# Altium PCB PCB1.PcbDoc
Units mil, origin at the board's own origin, x right, y up, seen from the top; angles counter-clockwise.
Board outline 1810 x 1180 mil, 2 copper layers (Top Layer, Bottom Layer); 39 components, 27 nets, 148 pads, 32 vias.
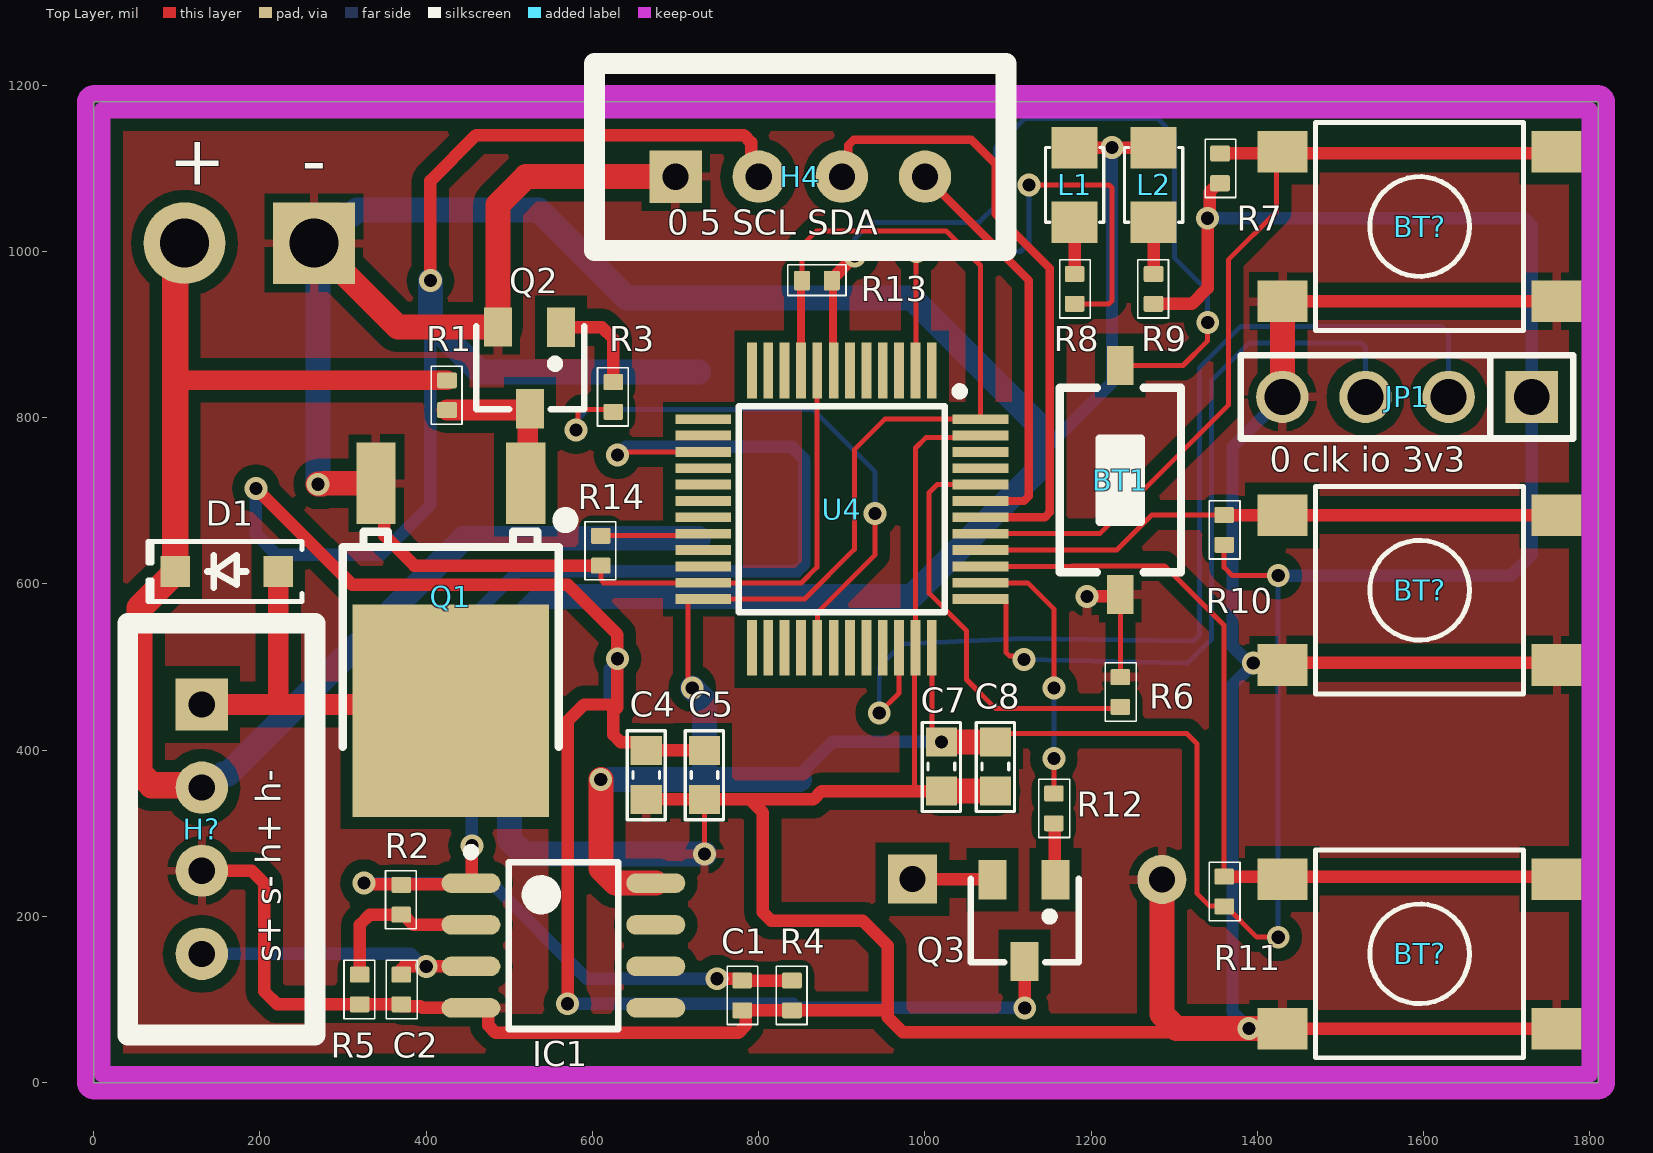
[diagram p0: Top Layer view]
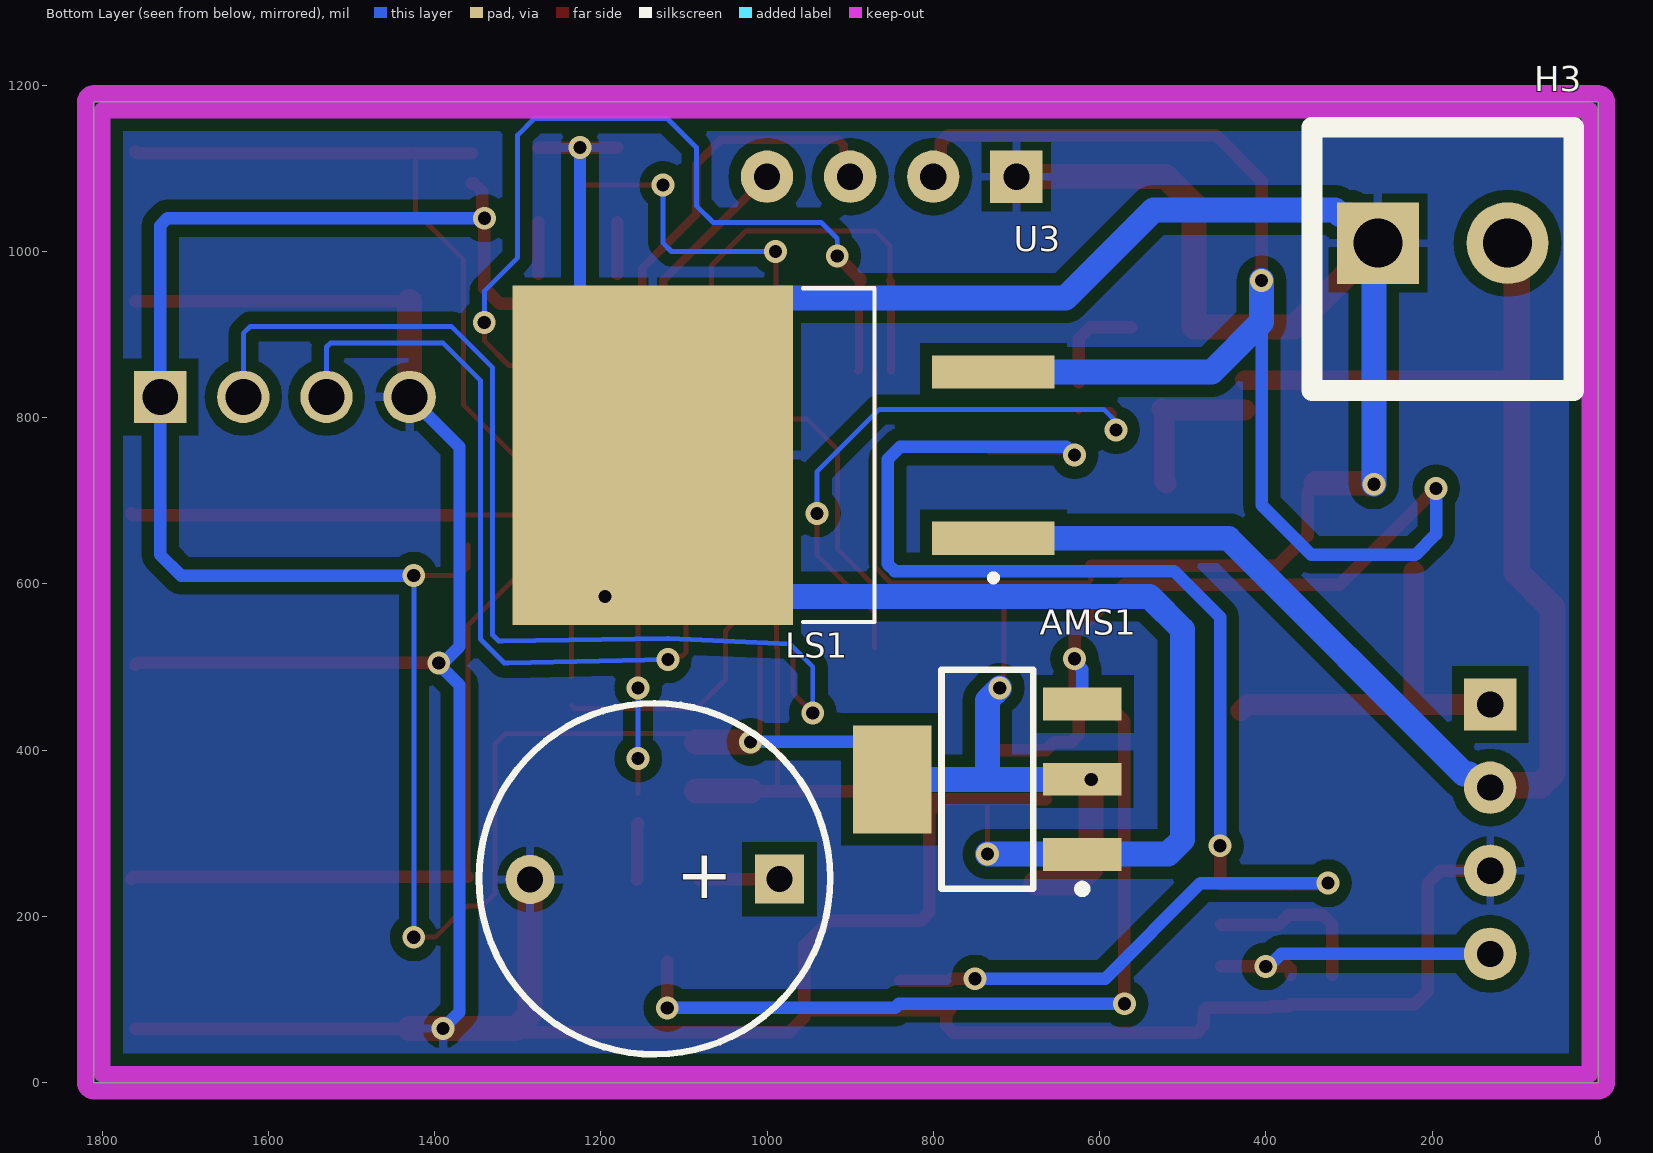
[diagram p1: Bottom Layer view, seen from below]
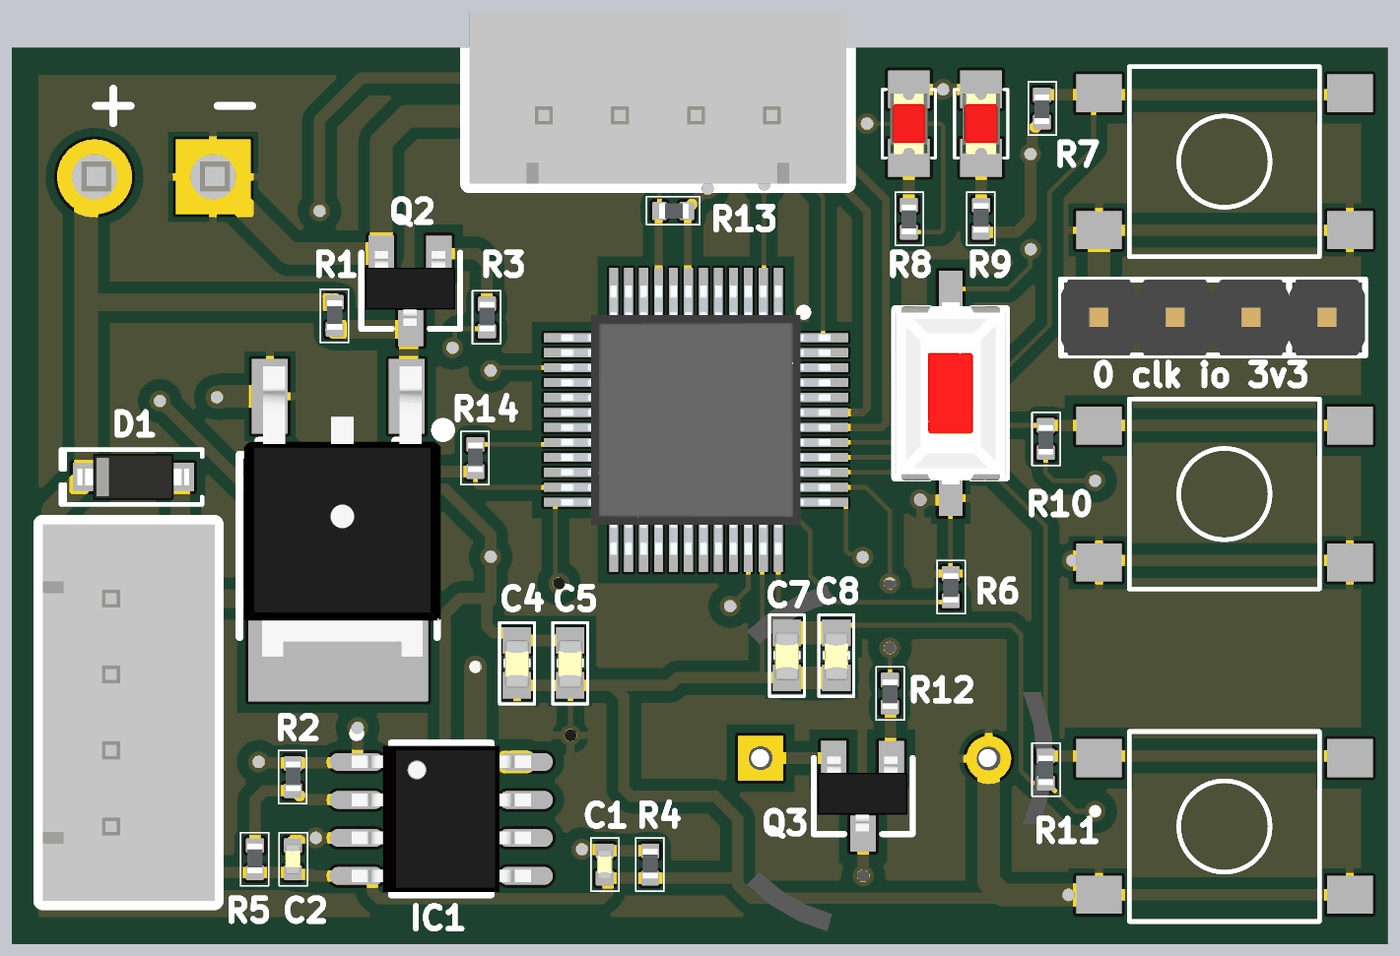
[diagram p2: 3D render of the assembled board from above, using the file's embedded part models]
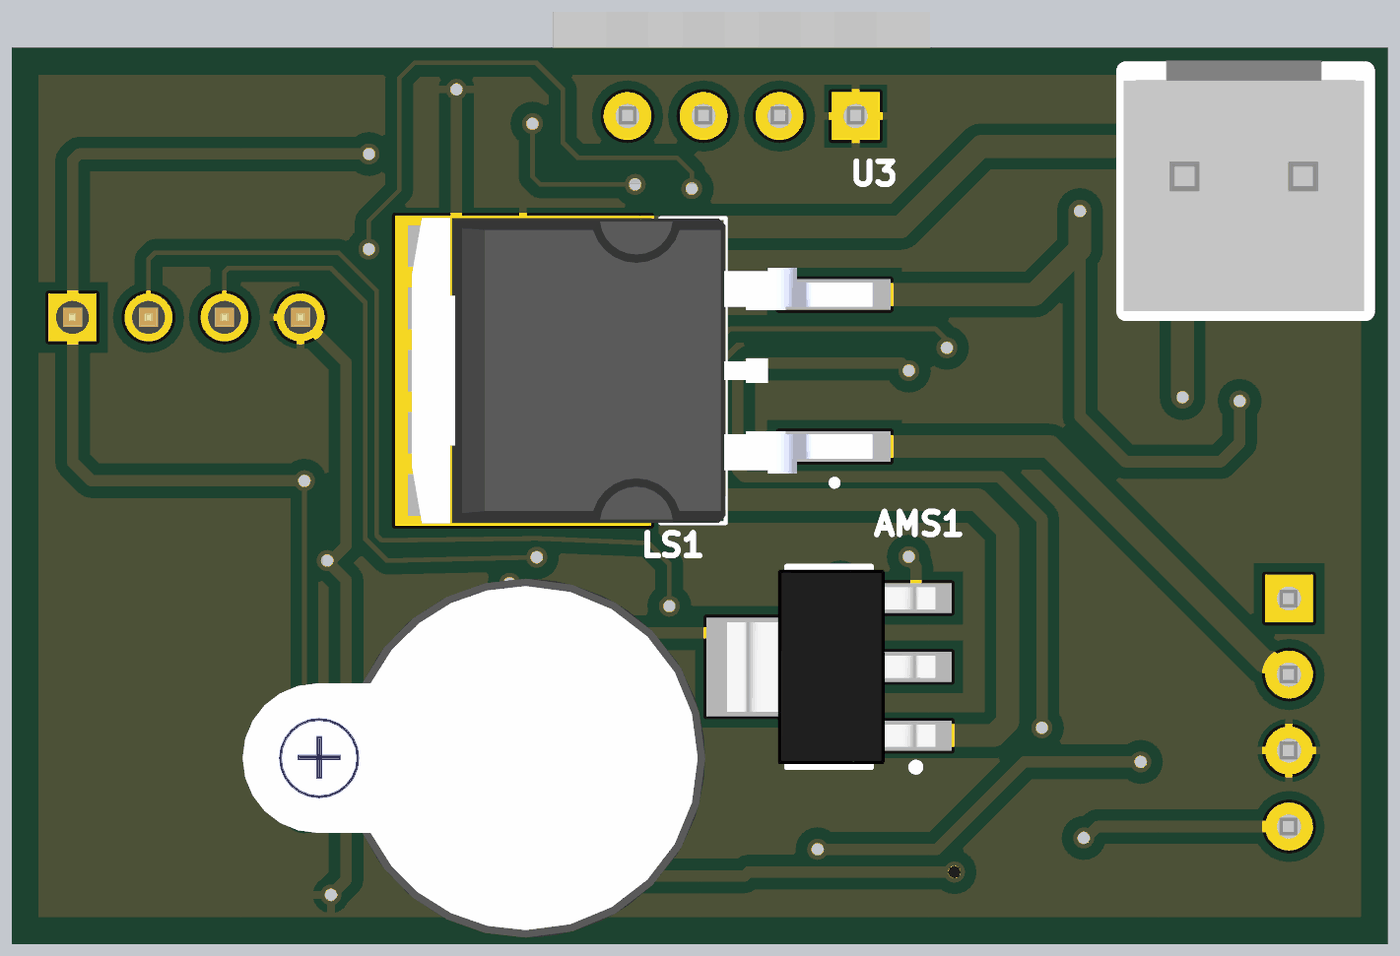
[diagram p3: 3D render of the assembled board from below, using the file's embedded part models]

## Layer stack, top to bottom
Top Solder: solder mask 0.4, Solder Resist, Dk 3.5
Top Layer: signal copper 1.4
Dielectric 1: dielectric 12.6, FR-4, Dk 4.8
Bottom Layer: signal copper 1.4
Bottom Solder: solder mask 0.4, Solder Resist, Dk 3.5

## Board outline
0,1180 0,0 1810,0 1810,1180

## Design rules (kind name [scope] priority, off if disabled: settings)
Clearance [All] p1: gap=15 ignorepadtopadclearanceinfootprint=FALSE
PolygonConnect [All] p1: connectstyle=Relief reliefconductorwidth=10 reliefentries=4 polygonreliefangle="90 Angle" airgapwidth=10
RoutingVias [All] p1: holewidth=11.81 width=27.56 viastyle="Through Hole" minholewidth=11.81 minwidth=27.56 maxholewidth=11.81 maxwidth=27.56
SolderMaskExpansion [All] p1: expansion=4 istentingtop=FALSE
Width [All] p1: maxlimit=30 minlimit=6 preferedwidth=15
30 further rules are at their usual default settings.

## Classes and differential pairs
component class Sheet1: AMS1 BT1 BT? C1 C2 C4 C5 C7 C8 D1 H3 H4 IC1 JP1 L1 L2 LS1 Q1 Q2 Q3 R1 R2 R3 R4 R5 R6 R7 R8 R9 R10 R11 R12 R13 R14 U3 U4

## Components (designator, comment, footprint, x,y, rotation, side; value= is the part's Value field where it differs from the comment)
AMS1 "AMS1117-3.3V" SOT223 735,365 r90 bottom value="AMS1117-3.3V SOT223"
BT1 "Nut Nhan 2 Chan SMD 3x6x2.5" "Nut Nhan 2 Chan SMD 3x6x2.5" 1235,725 r90 top
BT? "Nut Nhan 4 Chan SMD 6x6" "Nut Nhan 4 Chan SMD 6x6" 1595,1030 r0 top
BT? "Nut Nhan 4 Chan SMD 6x6" "Nut Nhan 4 Chan SMD 6x6" 1595,592.5 r0 top
BT? "Nut Nhan 4 Chan SMD 6x6" "Nut Nhan 4 Chan SMD 6x6" 1595,155 r0 top
C1 "102" "Cap 0402" 780,104 r270 top
C2 "102" "Cap 0402" 370,111.09 r270 top
C4 "10uF" "Cap 0603" 665,370 r270 top
C5 "0.1uF" "Cap 0603" 735,370 r270 top
C7 "0.1uF" "Cap 0603" 1020,380 r270 top
C8 "0.1uF" "Cap 0603" 1085,380 r270 top
D1 "S4" "DIODE SOD-123" 160,615 r180 top
H3 "source" VH3.96M-2 187.05,1010 r180 bottom
H4 "Header 4P 2.54 Duc Thang" XH2.54M-4 700,1090 r0 top
H? "Header 4P 2.54 Duc Thang" XH2.54M-4 130,455 r270 top
IC1 "LM358 SOP8" "SOP 8" 565,165 r0 top
JP1 "JP 1x4 2.54" "JP 1x4 DT" 1730,825 r180 top
L1 "LED 0805" LED-0805-Red 1180,1035 r90 top
L2 "LED 0805" LED-0805-Red 1275,1035 r90 top
LS1 "Coi Chip Speaker" "Coi Chip Speacker" 985,245 r0 bottom
Q1 "TO-252" TO-252-3_L6.6-W6.1-P4.57-LS9.9-BR-CW 435,545 r90 top
Q2 "BC817" SOT-23 525,860 r180 top value=C9014
Q3 "BC817" SOT-23 1120,195 r180 top value=C9014
R1 "10K" "RES 0402" 425,827.09 r90 top
R2 "10k" "RES 0402" 370,220 r90 top
R3 "4K7" "RES 0402" 625,825 r90 top
R4 "10k" "RES 0402" 840,105 r90 top
R5 "100R" "RES 0402" 320,112.09 r90 top
R6 "10k" "RES 0402" 1235,470 r270 top
R7 "10k" "RES 0402" 1355,1100 r270 top
R8 "?" "RES 0402" 1180,955 r270 top
R9 "10k" "RES 0402" 1275,955 r90 top (schematic designator R?)
R10 "10k" "RES 0402" 1360,665 r270 top
R11 "10k" "RES 0402" 1360,230 r270 top
R12 "470R" "RES 0402" 1155,330 r270 top
R13 "10k" "RES 0402" 870,965 r0 top
R14 "10k" "RES 0402" 610,640 r90 top
U3 "7805CD2T" TO254P1542X460-3N 980,755 r0 bottom
U4 "STM32F103C8T6" LQFP-48_19.6_393_58X11_SMD 900,690 r270 top

## Footprints (in the part's own frame and the unit in brackets; to place one, negate y for a bottom-side part, rotate by r counter-clockwise, add the part's x,y. Pads: shape width x height; smd on the part's side, far side on the other; paste and mask are expansions set on the pad)
"Cap 0402" [mm]
  rrect20% 0.49x0.6 smd: 1(-0.48,0) 2(0.43,0)
  silkscreen extent -0.91,-0.46 0.86,0.48, body extent -0.53,-0.25 0.47,0.25, height 0.5
"Cap 0603" [mil]
  rect 35x37.4 smd mask+3: 1(-29.83,-0.32) 2(29.23,-0.32)
  silkscreen extent -53,-23 54,23, body extent -30,-16 32,15, height 31
"Coi Chip Speacker" [mm]
  rect 1.5x1.5 hole 0.8: 1(0,0)
  round 1.5 hole 0.8: 2(7.62,0.013)
  silkscreen extent -1.55,-5.38 9.18,5.36, body extent -2.22,-6 13.24,6, height 4.5
"DIODE SOD-123" [mm] "SOD-123"
  rect 0.9x0.95 smd: 1(-1.575,0) 2(1.575,0)
  silkscreen extent -2.3,-0.92 2.41,0.92, body extent -1.86,-0.78 1.86,0.77, height 1.35
"JP 1x4 DT" [mm] "4 pins, 1 row, straight, gold plating"
  rect 1.6x1.6 hole 1.1: 1(0,0)
  round 1.6 hole 1.1: 2(2.54,0) 3(5.08,0) 4(7.62,0)
  silkscreen extent -1.27,-1.27 8.89,1.27, body extent -1.27,-1.27 8.89,1.27, height 8.54
LED-0805-Red [mil]
  rect 50x55 smd: 1(0,0) 2(90,0)
  silkscreen extent 0,-35 90,35, body extent 5,-25 85,25, height 43
LQFP-48_19.6_393_58X11_SMD [mm] "48LQFP"
  rect 1.7x0.3 smd mask+0.076: 1(-4.238,2.75) 2(-4.238,2.25) 3(-4.238,1.75) 4(-4.238,1.25) 5(-4.238,0.75) 6(-4.238,0.25) 7(-4.238,-0.25) 8(-4.238,-0.75) 9(-4.238,-1.25) 10(-4.238,-1.75) 11(-4.238,-2.25) 12(-4.238,-2.75) 25(4.238,-2.75) 26(4.238,-2.25) 27(4.238,-1.75) 28(4.238,-1.25) 29(4.238,-0.75) 30(4.238,-0.25) 31(4.238,0.25) 32(4.238,0.75) 33(4.238,1.25) 34(4.238,1.75) 35(4.238,2.25) 36(4.238,2.75)
  rect 0.3x1.7 smd mask+0.076: 13(-2.75,-4.238) 14(-2.25,-4.238) 15(-1.75,-4.238) 16(-1.25,-4.238) 17(-0.75,-4.238) 18(-0.25,-4.238) 19(0.25,-4.238) 20(0.75,-4.238) 21(1.25,-4.238) 22(1.75,-4.238) 23(2.25,-4.238) 24(2.75,-4.238) 37(2.75,4.238) 38(2.25,4.238) 39(1.75,4.238) 40(1.25,4.238) 41(0.75,4.238) 42(0.25,4.238) 43(-0.25,4.238) 44(-0.75,4.238) 45(-1.25,4.238) 46(-1.75,4.238) 47(-2.25,4.238) 48(-2.75,4.238)
  silkscreen extent -3.72,-3.15 3.15,3.73, body extent -4.5,-4.5 4.5,4.5, height 1.7
"Nut Nhan 2 Chan SMD 3x6x2.5" [mm] "Switch SMD type"
  rect 1.2x0.8 smd: 1(-3.5,0) 2(3.5,0)
  silkscreen extent -2.82,-1.85 2.82,1.85, body extent -3.05,-1.85 3.05,1.85, height 2.5
"Nut Nhan 4 Chan SMD 6x6" [mil] "SW SMD button 4pin, 250 x250 mil"
  rect 60x50 smd: 1(-165,90) 2(165,-90) 3(165,90) 4(-165,-90)
  silkscreen extent -125,-125 125,125, body extent -180,-125 180,125, height 130
"RES 0402" [mm]
  rrect20% 0.49x0.6 smd: 1(-0.455,0) 2(0.455,0)
  silkscreen extent -0.89,-0.46 0.89,0.48, body extent -0.47,-0.25 0.53,0.25, height 0.32
"SOP 8" [mm] "SOIC, 8-Leads, Body 4.9x3.9mm, Pitch 1.27mm, IPC High Density"
  oval 1.8x0.6 smd: 1(-2.825,1.905) 2(-2.825,0.635) 3(-2.825,-0.635) 4(-2.825,-1.905) 5(2.825,-1.905) 6(2.825,-0.635) 7(2.825,0.635) 8(2.825,1.905)
  silkscreen extent -2.95,-2.55 1.68,2.98, body extent -2.99,-2.45 3,2.45, height 1.6
SOT223 [mm]
  rect 1x2.4 smd: 1(-2.3,-2.9) 2(0,-2.9) 3(2.3,-2.9)
  rect 3.3x2.4 smd: 4(0,2.9)
  silkscreen extent -3.47,-3.02 3.35,1.4, body extent -3.25,-3.56 3.25,3.4, height 1.68
SOT-23 [mm] "SOT 23 _ 1-3-2"
  rect 0.85x1.2 smd: 1(-0.94,-1.245) 2(0.985,-1.25) 3(0.005,1.25)
  silkscreen extent -1.65,-1.27 1.65,1.27, body extent -1.47,-1.33 1.53,1.17, height 1.06
TO254P1542X460-3N [mm]
  rect 3.74x1.02 smd: 1(-6.41,2.54) 2(-6.41,-2.54)
  rect 8.56x10.37 smd paste-6: 3(4,0)
  silkscreen extent -6.51,-5.1 -0.59,5.1, body extent -7.71,-5.1 7.71,5.1, height 4.6
TO-252-3_L6.6-W6.1-P4.57-LS9.9-BR-CW [mm]
  rect 2.5x1.2 smd: 1(4.475,-2.149) 3(4.475,2.423)
  rect 6.5x6 smd: 2(-2.475,0.137)
  silkscreen extent -3.57,-3.56 3.55,3.44, body extent -4.23,-3.29 5.47,3.29, height 2.32
VH3.96M-2 [mm]
  rect 2.5x2.5 hole 1.5: 1(-1.98,0)
  round 2.5 hole 1.5: 2(1.98,0)
  silkscreen extent -4,-4.5 4,3.54, body extent -4.08,-4.49 3.96,3.88, height 10.26
XH2.54M-4 [mm]
  rect 1.6x1.6 hole 0.8: 1(0,0)
  round 1.6 hole 0.8: 2(2.54,0) 3(5.08,0) 4(7.62,0)
  silkscreen extent -2.48,-2.26 10.1,3.46, body extent -2.48,-2.26 10.1,3.48, height 6.91

## Part data
AMS1: library part "AMS1117 SMD", "Dán", Chung_Loai=Dán, Don_Vi=Con, Ma_Hang=MH000596
BT? BT? BT?: "Nut Nhan 4 Chan 6.2x6.2x3.5", Ma_Hang=MH002424, Ten="Nút Nhấn 4 Chân 6.2x6.2x3.1MM SMD"
C1 C2: library part "Cap 0402", "Capacitor SMD 0402"
C4 C5 C7 C8: library part "Cap 0603", "Capacitor SMD 0603"
D1: library part "Diode S4", "Dán", Chung_Loai=Dán, Don_Vi=Con, Ma_Hang=MH005519, Ten_Linh_Kien="Diode S4 SOD123 ( 1N5819 SOD123)"
H3: library part "Header 2P VH3.96 Duc Thang", "Cắm", Chung_Loai=Cắm, Don_Vi=Con, Ma_Hang=MH001283, Ten_Linh_Kien="Header 2P XH2.54-2P Đực Thẳng"
H4 H?: "Cắm", Chung_Loai=Cắm, Don_Vi=Con, Ma_Hang=MH001285, Ten_Linh_Kien="Header 4P XH2.54-4P Đực Thẳng"
IC1: "Dán", Chung_Loai=Dán, Don_Vi=Con, Ma_Hang=MH000609, Ten_Linh_Kien="LM358 SOP8"
JP1: library part "JP 1x4 2.54 Duc Thang", "Cắm", Chung_Loai=Cắm, Don_Vi=Con, Ma_Hang=MH000903, Ten_Linh_Kien="Jump Đơn Đực 2.54MM 1x40P Thẳng 11MM"
L1 L2: library part "LED 0805 Do", "Dán", Chung_Loai=Dán, Don_Vi=Con, Ma_Hang=MH000897, Ten_Linh_Kien="LED 0805 Màu Đỏ (Red)"
LS1: "Còi chip"
Q1: library part "FET AO D409", "P-Channel Power MOSFET", ComponentLink1Description="Manufacturer Link", ComponentLink1URL=http://www.irf.com/, ComponentLink2Description=Datasheet, ComponentLink2URL=http://www.irf.com/product-info/datasheets/data/irf9540.pdf, DatasheetVersion=PD-9.421C, LatestRevisionDate=17-Jul-2002, LatestRevisionNote="Re-released for DXP Platform.", Note="Pin 2 is electrically connected to pin 4.", PackageDescription="TO, Thru-Hole, Vertical, Heatsink Mounted; 3 In-Line Leads; Pitch 2.54 mm", PackageReference=TO-220AB, PackageVersion=Feb-1997, Published=8-Jun-2000, Publisher="Altium Limited"
Q2 Q3: library part "Trans BC817", "SOT-23 - C8658"
R1 R3 R5 R8 R12: library part "RES 0402", "RES SMD 0402", Manufacturer="Vishay Dale", Manufacturer Part Number=CRCW040210K0FKED, Operating Temperature="-55°C ~ 155°C", Package / Case="0402 (1005 Metric)", Power (Watts)="0.063W, 1/16W", Resistance (Ohms)=10k, Supplier Part Number 1=541-10.0KLCT-ND, Temperature Coefficient=±100ppm/°C, Tolerance=±1%, Category=Resistors, ComponentLink1Description=http://www.vishay.com/docs/20035/dcrcwe3.pdf, ComponentLink1URL=http://www.vishay.com/docs/20035/dcrcwe3.pdf, Composition="Thick Film", Features="Automotive AEC-Q200", Height="0.016\" (0.40mm)", Number of Terminations=2, Packaging="Cut Tape (CT)", Pricing 1="10=0.083, 50=0.0444, 200=0.0255, 1000=0.0174 (USD)", RoHS="RoHS Compliant", Size / Dimension="0.039\" L x 0.020\" W (1.00mm x 0.50mm)", Stock 1=2392462, Supplier 1=Digi-Key, Supplier Device Package="0402 (1005 Metric)"
R2 R4 R6 R7 R9 R10 R11 R13 R14: library part "RES 0402", "RES SMD 0402", Manufacturer="Vishay Dale", Manufacturer Part Number=CRCW040210K0FKED, Operating Temperature="-55°C ~ 155°C", Package / Case="0402 (1005 Metric)", Power (Watts)="0.063W, 1/16W", Supplier Part Number 1=541-10.0KLCT-ND, Temperature Coefficient=±100ppm/°C, Tolerance=±1%, Category=Resistors, ComponentLink1Description=http://www.vishay.com/docs/20035/dcrcwe3.pdf, ComponentLink1URL=http://www.vishay.com/docs/20035/dcrcwe3.pdf, Composition="Thick Film", Features="Automotive AEC-Q200", Height="0.016\" (0.40mm)", Number of Terminations=2, Packaging="Cut Tape (CT)", Pricing 1="10=0.083, 50=0.0444, 200=0.0255, 1000=0.0174 (USD)", Resistance (Ohms)=10k, RoHS="RoHS Compliant", Size / Dimension="0.039\" L x 0.020\" W (1.00mm x 0.50mm)", Stock 1=2392462, Supplier 1=Digi-Key, Supplier Device Package="0402 (1005 Metric)"
U3: "Linear Voltage Regulator IC Positive Fixed 1 Output 1.5A D2PAK", Package="D2PAK STMicroelectronics", Check_prices=https://www.snapeda.com/parts/7805CD2T/STMicroelectronics/view-part/?ref=eda, MF=STMicroelectronics, MP=7805CD2T, SnapEDA_Link=https://www.snapeda.com/parts/7805CD2T/STMicroelectronics/view-part/?ref=snap
U4: library part IC_STM32F103C8T6, "ARM® Cortex®-M3 STM32F1 Microcontroller IC 32-Bit 72MHz 64KB (64K x 8) FLASH 48-LQFP (7x7)", Alternate Part Number-1=NA, Case/Package=LQFP48, Manufacturer=STMicroelectronics, Manufacturer Part Number=STM32F103C8T6, Supplier Part Number-1=STM32F103C8T6, Supplier-1=LCSC
BT1: Ma_Hang=MH001036, Ten="Nút Nhấn 2 Chân 3x6x2.5MM SMD"

## Via types
v1: diameter 27.56, hole 15.75, Top Layer to Bottom Layer, tented both sides, 32 vias

## Nets (pads, with @x,y where several pads share a name; then routed paths per layer and width w, separated by ;. In a path a pad name is that pad's centre, name@x,y a point inside that pad or via, vN(x,y) a via of type N, cw(c..) or ccw(c..) an arc to the next point about the centre after c; other vN are vias at no path point)
5v: AMS1.3 C4.1 C5.1 H4.2 Q3.3 U3.2 | length 3317.4
  Top Layer w15: v1(195,715) 310.91,599.09 570,599.09 630,539.09 v1(630,510) 630,455 ; v1(405,965) 405,1085 460,1140 782.14,1140 790.93,1131.21 790.93,1099.07 H4.2 ; v1(570,95) 570,435 590,455 630,455 ; C5.1 C4.1 654.68,409.83 633.79,409.83 625,418.62 625,446.6 630,451.6 630,455 ; Q3.3 1119.9,145.69 1119.9,90.1 v1(1120,90)
  Bottom Layer w15: v1(195,715) 195,660 220,635 345,635 405,695 405,915 ; v1(570,95) 841.3,95 846.3,90 v1(1120,90) ; AMS1.3 620.83,497.43 630,506.6 v1(630,510)
  Bottom Layer w30: v1(405,965) 405,915 465,855 U3.2
ADC1: C1.1 IC1.1 R2.2 R4.2 U4.15 | length 1907
  Top Layer w6: v1(630,755) 633.9,758.9 U4.15
  Top Layer w15: v1(325,240) 326.04,238.96 368.96,238.96 R2.2 371.04,238.96 452.74,238.96 IC1.1 455,241.22 v1(455,285) ; v1(750,125) 777.91,125 C1.1 R4.2
  Bottom Layer w15: v1(325,240) 478.3,240 593.3,125 v1(750,125) ; v1(455,285) 455,560 510.5,615.5 846.21,615.5 855,624.29 855,750 840,765 640,765 v1(630,755)
CLK: JP1.3 U4.37 | length 932.9
  Top Layer w6: U4.37 1094.41,581.73 1097.32,578.83 1097.32,517.68 1101.53,513.47 1115.22,513.47 v1(1119.35,509.35)
  Bottom Layer w6: v1(1119.35,509.35) 1311.34,505.02 1316.31,505.02 1318.06,506.78 1345,533.72 1345,845 1390,890 1525,890 1530,885 JP1.3
coi: R12.1 U4.38 | length 323.2
  Top Layer w6: U4.38 1123.58,601.42 1155,570 v1(1155,475) ; R12.1 v1(1155,390)
  Bottom Layer w6: v1(1155,390) v1(1155,475)
decrease: BT?.1@1430,245 BT?.3@1760,245 R11.1 U4.39 | length 1031.5
  Top Layer w6: U4.39 1175.95,621.1 1176.67,621.83 1288.17,621.83 1360,550 R11.1
  Top Layer w15: R11.1 1762.09,247.91 BT?.3@1765,245
HEAT+: D1.2 H3.2 H?.2 R1.2 U3.1 | length 1791.1
  Top Layer w23.62: 97.99,845 R1.2
  Top Layer w25: D1.2@97.99,614.02 D1.2 ; H3.2@97.99,998.9 H3.2 ; H?.2@127.27,357.73 H?.2
  Top Layer w31.5: D1.2@97.99,614.02 55,571.02 55,372.38 69.64,357.73 H?.2@127.27,357.73 ; D1.2 97.99,845 H3.2@97.99,998.9
  Bottom Layer w30: H?.2 138.93,355 155.42,371.5 161.5,371.5 445,655 U3.1
HEAT-: D1.1 H?.1 Q1.2 | length 463.9
  Top Layer w25: H?.1 225,455 ; D1.1 222.01,457.99 225,455 ; Q1.2 422.18,455 225,455
increase: BT?.1@1430,1120 BT?.3@1760,1120 R7.1 U4.41 | length 1095.8
  Top Layer w6: U4.41 1210.47,660.47 1365,815 1365,990 1422.91,1047.91 1422.91,1117.91 1425,1120 BT?.1@1430,1120
  Top Layer w15: R7.1 BT?.1@1422.91,1117.91 ; BT?.1@1430,1117.91 1757.91,1117.91 BT?.3@1760,1120
IO: JP1.2 U4.34 | length 1265.1
  Top Layer w6: v1(945,445) 968.9,468.9 U4.34
  Bottom Layer w6: v1(945,445) 945,500.31 972.73,528.04 1118.32,534.11 cw(c1119.35,509.35) 1119.67,534.13 1318.07,531.56 1323.04,531.56 1330,538.51 1330,860 1380,910 1621.49,910 1630,901.49 JP1.2
NetIC1_2: IC1.2 R2.1 R5.2 | length 203.8
  Top Layer w15: R5.2 320,190 332.09,202.09 R2.1 372.17,202.09 384.25,190 IC1.2
NetL1_1: L1.1 R8.1 | length 62.1
  Top Layer w15: R8.1 L1.1
NetL2_1: L2.1 R9.2 | length 62.1
  Top Layer w15: R9.2 L2.1
NetLS1_1: LS1.1 Q3.2 | length 96.5
  Top Layer w15: LS1.1 1080.41,245 Q3.2
NetQ1_1: Q1.1 Q2.3 R1.1 | length 189.9
  Top Layer w25: R1.1 Q2.3@523.19,809.17 ; Q1.1 522.21,723.77 522.21,808.2 Q2.3@523.19,809.17 ; Q2.3 Q2.3@523.19,809.17
NetQ2_1: Q2.1 R3.2 | length 120.9
  Top Layer w15: Q2.1 611,909 625,895 R3.2
NetQ3_1: Q3.1 R12.2 | length 68.9
  Top Layer w15: R12.2 1156,311.09 1156,245 Q3.1
NetR6_2: R6.2 U4.44 | length 510.4
  Top Layer w6: U4.44 1014.53,719.53 1005,710 1005,588.66 1050,543.66 1050,485 1085,450 1231.49,450 R6.2@1235,453.51
NetR8_2: R8.2 U4.2 | length 636.7
  Top Layer w6: U4.2 989.29,857.56 989.29,999.29 v1(990,1000) ; v1(1125,1080) 1221.49,1080 1225,1076.49 1225,940.6 1221.49,937.09 R8.2
  Bottom Layer w6: v1(990,1000) 1115,1000 1125,1010 v1(1125,1080)
NetR14_2: R14.2 U4.20 | length 124.2
  Top Layer w6: R14.2 610.1,658.01 730.69,658.01 U4.20
PWM: R3.1 U4.29 | length 717.5
  Top Layer w6: v1(580,785) 582.78,787.78 582.78,806.49 586.29,810 622.09,810 R3.1 ; U4.29 870.47,565.47 940,635 v1(940,685)
  Bottom Layer w6: v1(580,785) 577.49,787.51 577.49,792.49 595,810 865,810 940,735 v1(940,685)
RESET: BT1.2 R13.2 U4.7 | length 1047.3
  Top Layer w6: BT1.2 1310.5,862.8 1339.71,892 1339.71,914.31 v1(1340.18,914.78)
  Top Layer w10: R13.2 889.38,963.54 889.38,857.63 U4.7
  Top Layer w15: R13.2 887.91,967.17 915,994.25 915,994.98 v1(915.53,994.45)
  Bottom Layer w6: v1(915.53,994.45) 915.53,1015.53 935,1035 1065,1035 1085,1055 1085,1125 1120,1160 1280,1160 1300,1140 1300,992.5 1340.18,952.32 v1(1340.18,914.78)
SCL: H4.3 U4.42 | length 764.7
  Top Layer w10: H4.3 907.88,1097.88 907.88,1127.88 914.5,1134.5 1055.5,1134.5 1085,1105 1085,1045 1150,980 1150,686.02 1144.14,680.16 U4.42
SDA: H4.4 U4.43 | length 496.7
  Top Layer w10: H4.4 1125,965 1125,705.7 1119.14,699.84 U4.43
sleep: BT?.1@1430,682.5 BT?.3@1760,682.5 R10.1 U4.40 | length 716.5
  Top Layer w6: U4.40 1230.79,640.79 1272.91,682.91 R10.1 R10.1@1370,682.91
  Top Layer w15: R10.1@1370,682.91 1762.91,682.91 BT?.3@1765,685
ther+: C2.1 H?.4 IC1.3 | length 367.8
  Top Layer w15: C2.1 370,136.21 373.79,140 v1(400,140) IC1.3
  Bottom Layer w15: H?.4 381.6,155 396.6,140 v1(400,140)
VDDA: AMS1.2 AMS1.4 C7.1 C8.1 IC1.8 JP1.1 R7.2 R9.1 R10.2 R11.2 R13.1 U4.9 U4.24 U4.36 U4.48 | length 4482
  Top Layer w6: v1@715,480 715,578.83 717.91,581.73 U4.24 855,581.73 915,641.73 915,761.49 951.78,798.27 U4.48 1066.85,983.15 1025.22,1024.78 869.78,1024.78 852.09,1007.09 R13.1 ; U4.36 1008.27,421.24 C7.1 ; C8.1@1084.83,409.98 1094.85,420 1315,420 1327.5,407.5 1327.5,227.5 1342.7,212.3 1359.79,212.3 R11.2 1362.17,212.09 1399.25,175 v1(1425,175) ; R10.2 1360,620 1370,610 v1(1425,610)
  Top Layer w10: U4.9 850.79,963.7 R13.1
  Top Layer w15: R9.1 1321.21,937.09 1340,955.87 v1(1340,1040) 1342.4,1042.4 1342.4,1071.65 1352.83,1082.09 R7.2
  Top Layer w30: v1(610,365) 610,257.57 627.57,240 IC1.8 ; C7.1 C8.1
  Bottom Layer w6: v1(1425,175) v1(1425,610)
  Bottom Layer w15: AMS1.4 849.17,370.26 888.92,410 v1(1020,410) ; v1(1340,1040) 1721.21,1040 1730,1031.21 JP1.1 1730,635 1705,610 v1(1425,610)
  Bottom Layer w30: AMS1.2 735,365 ; v1(720,475) 735,460 735,365 ; AMS1.4 735,365
VSSA: AMS1.1 BT1.1 BT?.2 BT?.4 C1.2 C2.2 C4.2 C5.2 C7.2 C8.2 H3.1 H4.1 H?.3 IC1.4 JP1.4 L1.2 L2.2 LS1.2 Q1.3 Q2.2 R4.1 R5.1 R6.1 R14.1 U3.3 U4.8 U4.23 U4.35 U4.47 | length 9796.4
  Top Layer w6: R14.1 610,604.93 613.51,601.42 U4.23 851.42,601.42 870,620 870,856.38 U4.8 ; C5.2 735,340.45 v1(735,275) ; 990,350.77 987.37,353.4 987.37,521.94 U4.35 988.58,763.58 1001,776 1064.27,776 U4.47 ; R6.1 BT1.1
  Top Layer w15: H?.3 190,255 205,240 205,110 220.83,94.17 C2.2 372.15,92.03 392.97,92.03 395,90 470.73,90 474.71,86.02 474.71,68.79 483.5,60 775.52,60 784.31,68.79 784.31,84.94 C1.2@782.17,87.09 ; Q1.3 349.58,711.23 349.58,658.26 385.75,622.09 R14.1 ; C4.2 C5.2 789.23,340.77 ; C1.2 C1.2@782.17,87.09 ; C7.2 990,350.77 875.77,350.77 865.77,340.77 789.23,340.77 ; L1.2 v1(1225,1125) L2.2 ; v1(1195,585) 1232.8,585 BT1.1 ; 1302.57,65 1298.29,60.72 973.07,60.72 955,78.79 955,90 ; v1(1395,505) 1757.5,505 BT?.2@1760,502.5 ; BT?.4@1430,940 BT?.2@1760,940 ; BT?.4@1435,65 BT?.2@1760,65 ; C1.2@782.17,87.09 R4.1 952.09,87.09 955,90 ; 789.23,340.77 805,325 805,205 815,195 925,195 955,165 955,90
  Top Layer w30: H3.1 365.79,909.21 Q2.2 486.2,1056.2 520,1090 H4.1 ; v1(270,720) 275,720 276.18,721.18 Q1.3 ; C7.2 C8.2 ; LS1.2 1285,82.57 1302.57,65 v1(1390,65) BT?.4@1430,65 ; JP1.4 BT?.4@1430,940
  Bottom Layer w15: U3.3 1225,842.52 v1(1225,1125) ; v1(1390,65) 1370,85 1370,478.69 1395,503.69 v1(1395,505) 1390,505 1370,525 1370,765 JP1.4
  Bottom Layer w30: v1(270,720) 270,1005 H3.1 299.21,1044.21 311,1044.21 316.79,1050 535,1050 640.87,944.13 983.98,944.13 1137.48,790.63 U3.3 1137.48,738.5 983.98,585 540,585 500,545 500,292.57 517.57,275 v1(735,275)
pads on no net: IC1.5 IC1.6 IC1.7 U4.1 U4.3 U4.4 U4.5 U4.6 U4.10 U4.11 U4.12 U4.13 U4.14 U4.16 U4.17 U4.18 U4.19 U4.21 U4.22 U4.25 U4.26 U4.27 U4.28 U4.30 U4.31 U4.32 U4.33 U4.45 U4.46

## Polygon pours and split planes (outlines as drawn)
VSSA on Top Layer "VSSA_L01_P000" (solid, pour order 0): 0,1180 0,0 1810,0 1810,1180
VSSA on Bottom Layer "VSSA_L02_P001" (solid, pour order 1): 0,1180 0,0 1810,0 1810,1180

## Keep-outs
Keep-Out Layer:
  lines w20: -10,0 ccw(c0,0) 0,-10 ; -10,0 ccw(c0,0) 0,-10 ; -10,0 -10,1180 ; -10,1180 cw(c0,1180) 0,1190 ; -10,1180 cw(c0,1180) 0,1190 ; 0,-10 1810,-10 ; 0,1190 1810,1190 ; 1810,-10 ccw(c1810,0) 1820,0 ; 1810,-10 ccw(c1810,0) 1820,0 ; 1810,1190 cw(c1810,1180) 1820,1180 ; 1810,1190 cw(c1810,1180) 1820,1180 ; 1820,0 1820,1180 ; 10,10 10,1170 1800,1170 1800,10 10,10

## Silkscreen, mask and mechanical layers (free items; w line width, h text height)
Top Overlay:
  text "+" at 90,1080 h60
  text "-" at 250,1080.01 h60
  text "0 5 SCL SDA" at 690,1020 h30
  text "0 clk io 3v3" at 1415,735 h30
  text "s+ s- h+ h-" at 225,145 h30 r90

## Text inside footprints (layer, text, board x,y; h text height)
LS1: Bottom Overlay "+" at 1040.5,273 h60 r180